# Altium PCB 0505_MEZ.PcbDoc
Units mil, origin at the board's own origin, x right, y up, seen from the top; angles counter-clockwise.
Board outline 2480.31 x 2519.68 mil, 2 copper layers (Top Layer, Bottom Layer); 5 components, 40 nets, 276 pads, 179 vias.
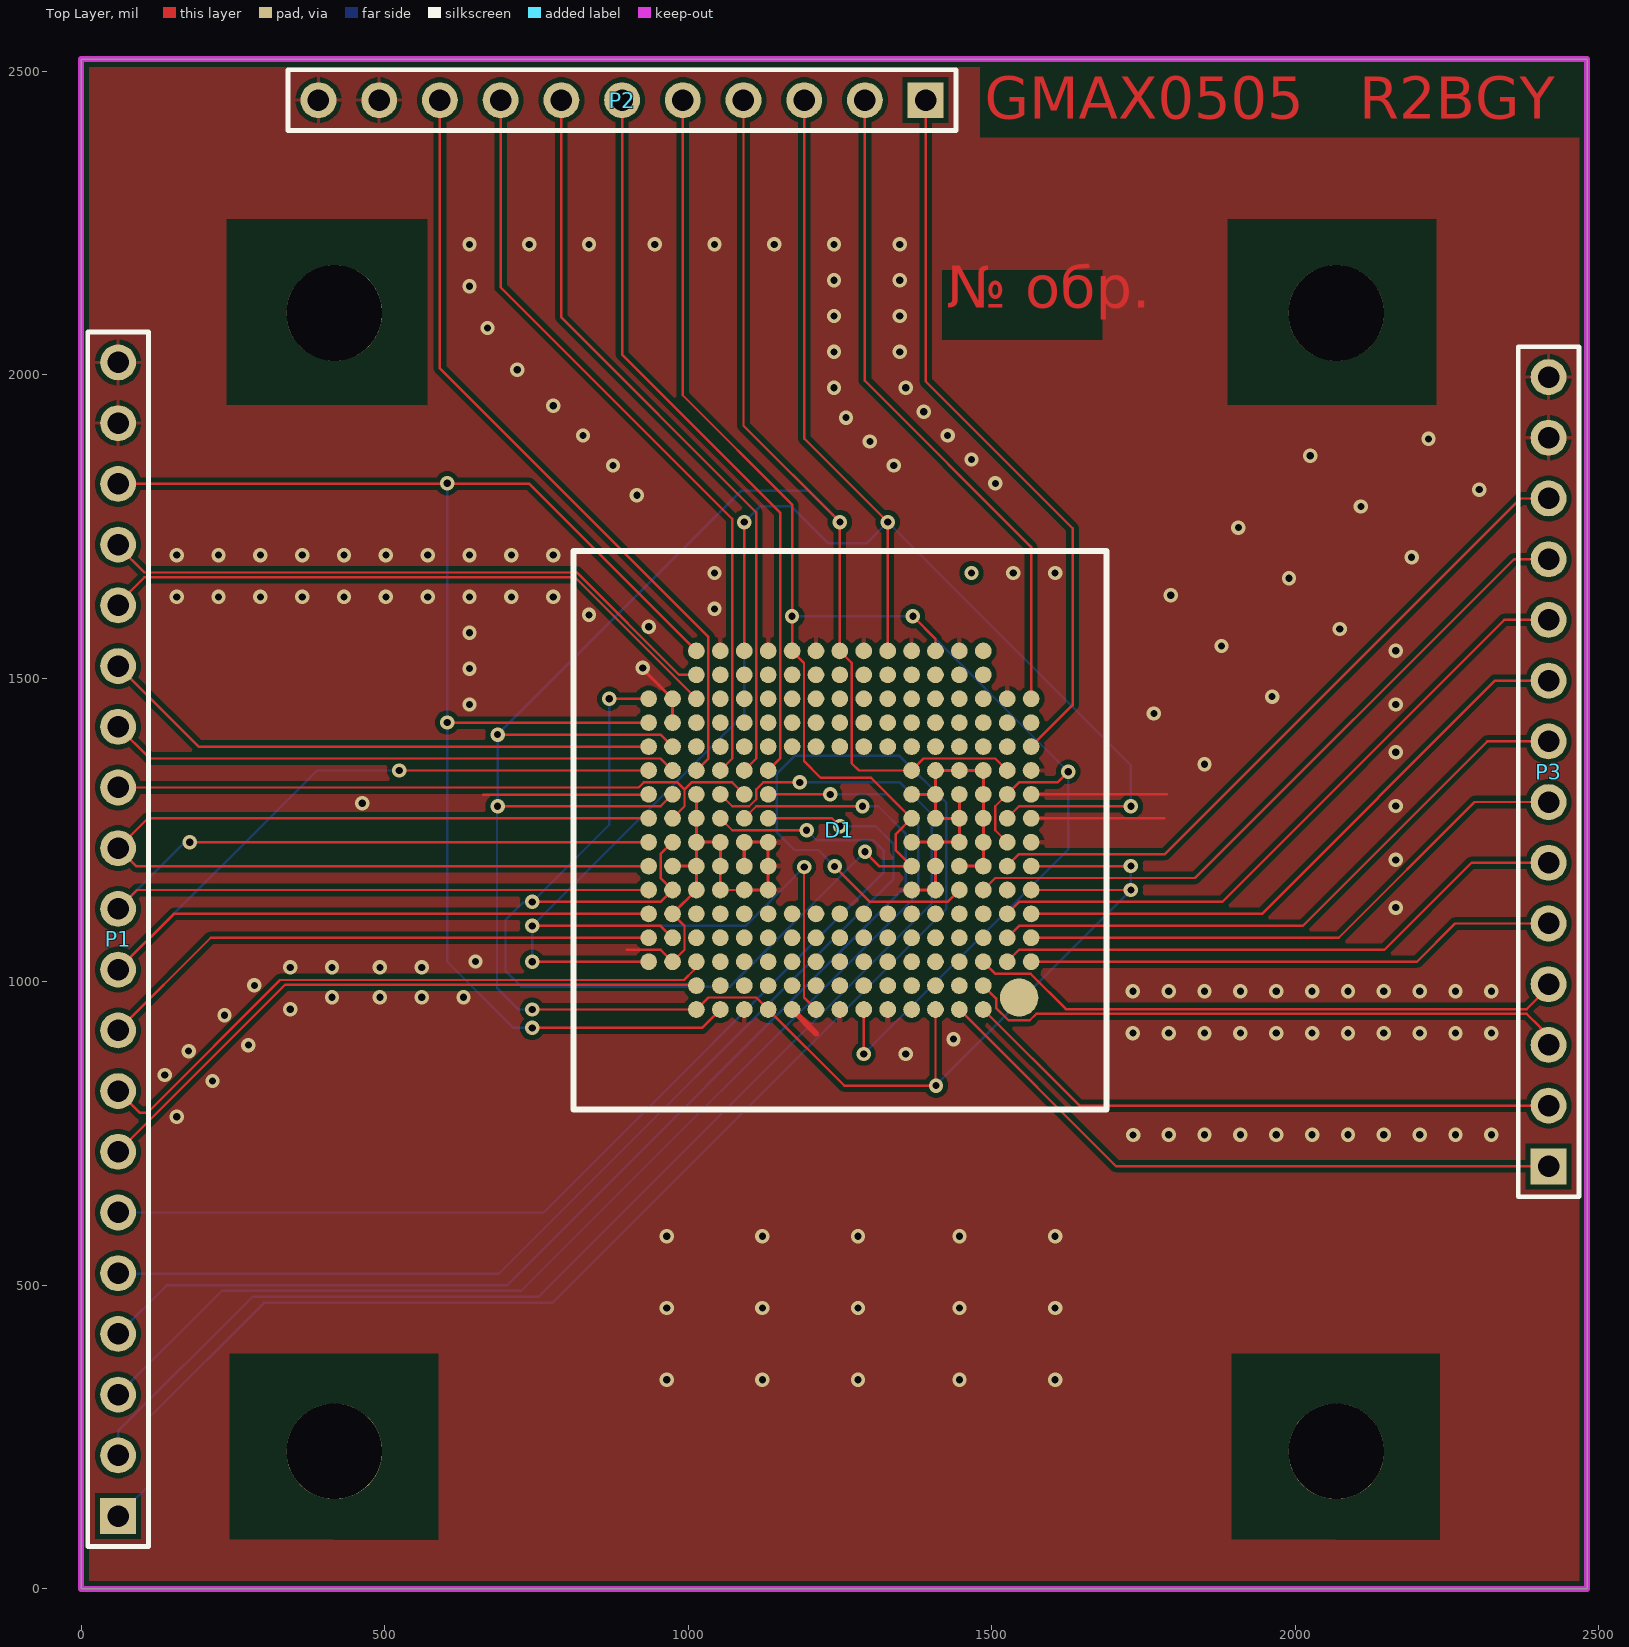
[diagram p0: Top Layer view]
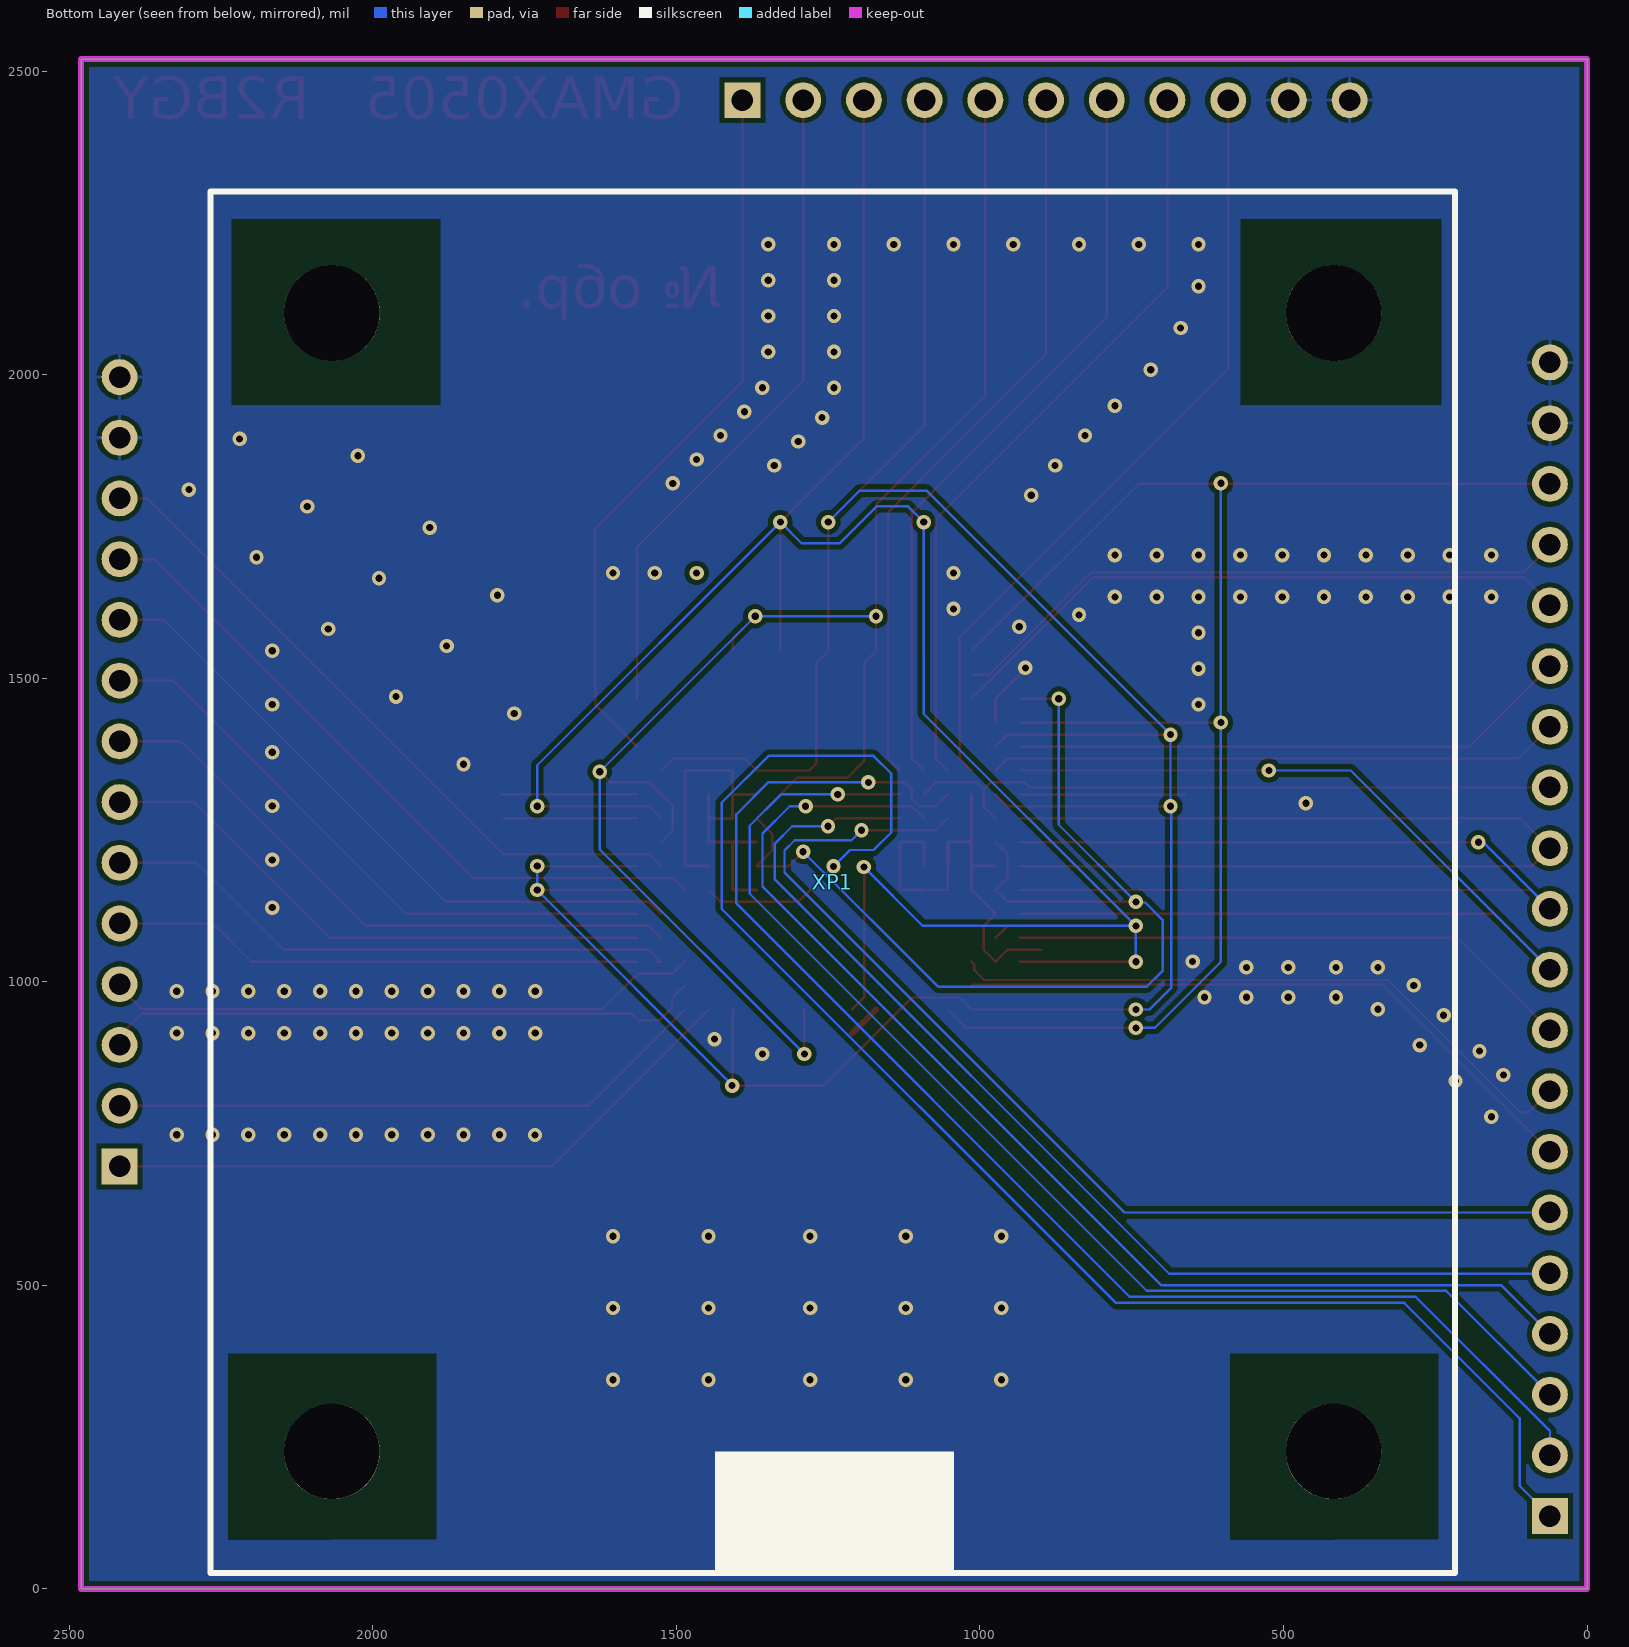
[diagram p1: Bottom Layer view, seen from below]

## Layer stack, top to bottom
Top Solder: solder mask 0.4, Solder Resist, Dk 3.5
Top Layer: signal copper 1.4
Dielectric 1: dielectric 12.6, FR-4, Dk 4.8
Bottom Layer: signal copper 1.4
Bottom Solder: solder mask 0.4, Solder Resist, Dk 3.5

## Board outline
0,0 0,2519.68 2480.31,2519.68 2480.31,0

## Design rules (kind name [scope] priority, off if disabled: settings)
BoardOutlineClearance [OnLayer('Multi-Layer')] p1: gap=10 ignorepadtopadclearanceinfootprint=FALSE except(0: Arc-SplitContinuation Track-SplitContinuation SMDPad-SplitContinuation THPad-SplitContinuation Via-SplitContinuation Fill-SplitContinuation Poly-SplitContinuation Region-SplitContinuation Text-SplitContinuation; 15.75: Arc-OutlineEdge Track-OutlineEdge SMDPad-OutlineEdge THPad-OutlineEdge Via-OutlineEdge Fill-OutlineEdge Poly-OutlineEdge Region-OutlineEdge Text-OutlineEdge)
Clearance [All] p1: gap=4.92 ignorepadtopadclearanceinfootprint=FALSE except(3.94: Track-Track Track-SMDPad Track-THPad Track-Via; 7.87: Arc-Fill Arc-Poly Track-Fill Track-Poly SMDPad-Fill SMDPad-Poly THPad-Fill THPad-Poly Via-Fill Via-Poly Fill-Fill Fill-Poly Poly-Poly Poly-Region Poly-Text; 9.84: Arc-Hole Track-Hole SMDPad-Hole THPad-Hole Via-Hole Fill-Hole Poly-Hole Region-Hole Text-Hole) // Standart
DiffPairsRouting [All] p1: maxlimit=10 minlimit=5 mostfreqgap=5.12 toplayer_minwidth=5 toplayer_maxwidth=15 toplayer_prefwidth=14.57 bottomlayer_minwidth=5 bottomlayer_maxwidth=15 bottomlayer_prefwidth=14.57 maxuncoupledlength=500
HoleSize [All] p1: absolutevalues=TRUE maxlimit=196.85 minlimit=11.81 maxpercent=80.000 minpercent=20.000
MinimumSolderMaskSliver [All] p1: minsoldermaskwidth=2.95
PlaneClearance "PlaneClearance-1 1/2 Oz" [All] p1: clearance=7.87 // Standart
PlaneConnect "TermalConnect-1 1/2 Oz" [All] p1: planeconnectstyle=Relief reliefexpansion=7.87 reliefentries=4 reliefconductorwidth=7.87 reliefairgap=7.87 // Standart
PolygonConnect "PolygonConnect-1 1/2 Oz" [All] p1: thpad.connectstyle=Relief thpad.reliefconductorwidth=5.91 thpad.reliefentries=4 thpad.polygonreliefangle="90 Angle" thpad.airgapwidth=7.87 smdpad.connectstyle=Relief smdpad.reliefconductorwidth=7.87 smdpad.reliefentries=4 smdpad.polygonreliefangle="90 Angle" smdpad.airgapwidth=7.87 via.connectstyle=Direct via.reliefconductorwidth=10 via.reliefentries=4 via.polygonreliefangle="90 Angle" via.airgapwidth=10 // Standart
RoutingVias [All] p1: holewidth=11.81 width=50 viastyle="Through Hole" minholewidth=11.81 minwidth=23.62 maxholewidth=28 maxwidth=50
SilkToSilkClearance [All] p1: silktosilkclearance=0
SilkToSolderMaskClearance [IsPad] p1: minsilkscreentomaskgap=0 clearancetoexposedcopper=TRUE
SolderMaskExpansion [All] p1: expansion=4 istentingtop=FALSE
UnRoutedNet [All] p1: checkbadconnections=TRUE
Width [All] p1: maxlimit=98.43 minlimit=3.94 preferedwidth=3.94
22 further rules are at their usual default settings.

## Classes and differential pairs
component class Sheet1_GMAX0505_MEZ: D1 P1 P2 P3
differential pair OUTT0: +OUTT0_P -OUTT0_N
differential pair OUTB0: +OUTB0_P -OUTB0_N
differential pair CLKOUT: +CLKOUT_P -CLKOUT_N

## Components (designator, comment, footprint, x,y, rotation, side; value= is the part's Value field where it differs from the comment)
D1 "GMAX0505" GMAX0505 1545,974 r0 top
P1 "Header 20" HDR1X20 61,120 r90 top
P2 "Header 11" HDR1X11 1391,2452 r180 top
P3 "Header 14" HDR1X14 2417,696 r90 top
XP1 "Грелка" Грелка 417.24,2101.46 r90 bottom

## Footprints (in the part's own frame and the unit in brackets; to place one, negate y for a bottom-side part, rotate by r counter-clockwise, add the part's x,y. Pads: shape width x height; smd on the part's side, far side on the other; paste and mask are expansions set on the pad)
GMAX0505 [mm] "GMAX0505"
  round 1.6 smd: 3(0,0)
  round 0.7 smd: A3(-1.5,-0.5) A4(-2.5,-0.5) A5(-3.5,-0.5) A6(-4.5,-0.5) A7(-5.5,-0.5) A8(-6.5,-0.5) A9(-7.5,-0.5) A10(-8.5,-0.5) A11(-9.5,-0.5) A12(-10.5,-0.5) A13(-11.5,-0.5) A14(-12.5,-0.5) A15(-13.5,-0.5) B3(-1.5,0.5) B4(-2.5,0.5) B5(-3.5,0.5) B6(-4.5,0.5) B7(-5.5,0.5) B8(-6.5,0.5) B9(-7.5,0.5) B10(-8.5,0.5) B11(-9.5,0.5) B12(-10.5,0.5) B13(-11.5,0.5) B14(-12.5,0.5) B15(-13.5,0.5) C1(0.5,1.5) C2(-0.5,1.5) C3(-1.5,1.5) C4(-2.5,1.5) C5(-3.5,1.5) C6(-4.5,1.5) C7(-5.5,1.5) C8(-6.5,1.5) C9(-7.5,1.5) C10(-8.5,1.5) C11(-9.5,1.5) C12(-10.5,1.5) C13(-11.5,1.5) C14(-12.5,1.5) C15(-13.5,1.5) C16(-14.5,1.5) C17(-15.5,1.5) D1(0.5,2.5) D2(-0.5,2.5) D3(-1.5,2.5) D4(-2.5,2.5) D5(-3.5,2.5) D6(-4.5,2.5) D7(-5.5,2.5) D8(-6.5,2.5) D9(-7.5,2.5) D10(-8.5,2.5) D11(-9.5,2.5) D12(-10.5,2.5) D13(-11.5,2.5) D14(-12.5,2.5) D15(-13.5,2.5) D16(-14.5,2.5) D17(-15.5,2.5) E1(0.5,3.5) E2(-0.5,3.5) E3(-1.5,3.5) E4(-2.5,3.5) E5(-3.5,3.5) E6(-4.5,3.5) E7(-5.5,3.5) E8(-6.5,3.5) E9(-7.5,3.5) E10(-8.5,3.5) E11(-9.5,3.5) E12(-10.5,3.5) E13(-11.5,3.5) E14(-12.5,3.5) E15(-13.5,3.5) E16(-14.5,3.5) E17(-15.5,3.5) F1(0.5,4.5) F2(-0.5,4.5) F3(-1.5,4.5) F4(-2.5,4.5) F5(-3.5,4.5) F6(-4.5,4.5) F12(-10.5,4.5) F13(-11.5,4.5) F14(-12.5,4.5) F15(-13.5,4.5) F16(-14.5,4.5) F17(-15.5,4.5) G1(0.5,5.5) G2(-0.5,5.5) G3(-1.5,5.5) G4(-2.5,5.5) G5(-3.5,5.5) G6(-4.5,5.5) G12(-10.5,5.5) G13(-11.5,5.5) G14(-12.5,5.5) G15(-13.5,5.5) G16(-14.5,5.5) G17(-15.5,5.5) H1(0.5,6.5) H2(-0.5,6.5) H3(-1.5,6.5) H4(-2.5,6.5) H5(-3.5,6.5) H6(-4.5,6.5) H12(-10.5,6.5) H13(-11.5,6.5) H14(-12.5,6.5) H15(-13.5,6.5) H16(-14.5,6.5) H17(-15.5,6.5) J1(0.5,7.5) J2(-0.5,7.5) J3(-1.5,7.5) J4(-2.5,7.5) J5(-3.5,7.5) J6(-4.5,7.5) J12(-10.5,7.5) J13(-11.5,7.5) J14(-12.5,7.5) J15(-13.5,7.5) J16(-14.5,7.5) J17(-15.5,7.5) K1(0.5,8.5) K2(-0.5,8.5) K3(-1.5,8.5) K4(-2.5,8.5) K5(-3.5,8.5) K6(-4.5,8.5) K12(-10.5,8.5) K13(-11.5,8.5) K14(-12.5,8.5) K15(-13.5,8.5) K16(-14.5,8.5) K17(-15.5,8.5) L1(0.5,9.5) L2(-0.5,9.5) L3(-1.5,9.5) L4(-2.5,9.5) L5(-3.5,9.5) L6(-4.5,9.5) L12(-10.5,9.5) L13(-11.5,9.5) L14(-12.5,9.5) L15(-13.5,9.5) L16(-14.5,9.5) L17(-15.5,9.5) M1(0.5,10.5) M2(-0.5,10.5) M3(-1.5,10.5) M4(-2.5,10.5) M5(-3.5,10.5) M6(-4.5,10.5) M7(-5.5,10.5) M8(-6.5,10.5) M9(-7.5,10.5) M10(-8.5,10.5) M11(-9.5,10.5) M12(-10.5,10.5) M13(-11.5,10.5) M14(-12.5,10.5) M15(-13.5,10.5) M16(-14.5,10.5) M17(-15.5,10.5) N1(0.5,11.5) N2(-0.5,11.5) N3(-1.5,11.5) N4(-2.5,11.5) N5(-3.5,11.5) N6(-4.5,11.5) N7(-5.5,11.5) N8(-6.5,11.5) N9(-7.5,11.5) N10(-8.5,11.5) N11(-9.5,11.5) N12(-10.5,11.5) N13(-11.5,11.5) N14(-12.5,11.5) N15(-13.5,11.5) N16(-14.5,11.5) N17(-15.5,11.5) P1(0.5,12.5) P2(-0.5,12.5) P3(-1.5,12.5) P4(-2.5,12.5) P5(-3.5,12.5) P6(-4.5,12.5) P7(-5.5,12.5) P8(-6.5,12.5) P9(-7.5,12.5) P10(-8.5,12.5) P11(-9.5,12.5) P12(-10.5,12.5) P13(-11.5,12.5) P14(-12.5,12.5) P15(-13.5,12.5) P16(-14.5,12.5) P17(-15.5,12.5) R3(-1.5,13.5) R4(-2.5,13.5) R5(-3.5,13.5) R6(-4.5,13.5) R7(-5.5,13.5) R8(-6.5,13.5) R9(-7.5,13.5) R10(-8.5,13.5) R11(-9.5,13.5) R12(-10.5,13.5) R13(-11.5,13.5) R14(-12.5,13.5) R15(-13.5,13.5) T3(-1.5,14.5) T4(-2.5,14.5) T5(-3.5,14.5) T6(-4.5,14.5) T7(-5.5,14.5) T8(-6.5,14.5) T9(-7.5,14.5) T10(-8.5,14.5) T11(-9.5,14.5) T12(-10.5,14.5) T13(-11.5,14.5) T14(-12.5,14.5) T15(-13.5,14.5)
  silkscreen extent -18.65,-4.67 3.65,18.68
HDR1X11 [mm] "Connector; Header; 11 Position"
  rect 1.5x1.5 hole 0.9: 1(0,0)
  round 1.5 hole 0.9: 2(2.54,0) 3(5.08,0) 4(7.62,0) 5(10.16,0) 6(12.7,0) 7(15.24,0) 8(17.78,0) 9(20.32,0) 10(22.86,0) 11(25.4,0)
  silkscreen extent -1.27,-1.27 26.67,1.27
HDR1X14 [mm] "Connector; Header; 14 Position"
  rect 1.5x1.5 hole 0.9: 1(0,0)
  round 1.5 hole 0.9: 2(2.54,0) 3(5.08,0) 4(7.62,0) 5(10.16,0) 6(12.7,0) 7(15.24,0) 8(17.78,0) 9(20.32,0) 10(22.86,0) 11(25.4,0) 12(27.94,0) 13(30.48,0) 14(33.02,0)
  silkscreen extent -1.27,-1.27 34.29,1.27
HDR1X20 [mm] "Connector; Header; 20 Position"
  rect 1.5x1.5 hole 0.9: 1(0,0)
  round 1.5 hole 0.9: 2(2.54,0) 3(5.08,0) 4(7.62,0) 5(10.16,0) 6(12.7,0) 7(15.24,0) 8(17.78,0) 9(20.32,0) 10(22.86,0) 11(25.4,0) 12(27.94,0) 13(30.48,0) 14(33.02,0) 15(35.56,0) 16(38.1,0) 17(40.64,0) 18(43.18,0) 19(45.72,0) 20(48.26,0)
  silkscreen extent -1.27,-1.27 49.53,1.27
Грелка [mm]
  round 4 hole 4 unplated: 0(-47.625,0) 0(-47.625,41.91) 0(0,0) 0(0,41.91)
  silkscreen extent -52.7,-5.08 5.08,46.99

## Part data
P1: "Header, 20-Pin", LatestRevisionDate=17-Jul-2002, LatestRevisionNote="Re-released for DXP Platform.", Publisher="Altium Limited"
P2: "Header, 11-Pin", LatestRevisionDate=17-Jul-2002, LatestRevisionNote="Re-released for DXP Platform.", Publisher="Altium Limited"
P3: "Header, 14-Pin", LatestRevisionDate=17-Jul-2002, LatestRevisionNote="Re-released for DXP Platform.", Publisher="Altium Limited"

## Via types
v1: diameter 23.62, hole 11.81, Top Layer to Bottom Layer, 179 vias

## Nets (pads, with @x,y where several pads share a name; then routed paths per layer and width w, separated by ;. In a path a pad name is that pad's centre, name@x,y a point inside that pad or via, vN(x,y) a via of type N, cw(c..) or ccw(c..) an arc to the next point about the centre after c; other vN are vias at no path point)
CLK_REF: D1.L14 P2.8 | length 1270.2
  Top Layer w3.94: P2.8 691,2144 1072.56,1762.44 1072.56,1497.34 1072.56,1367.7 D1.L14
CLKOUT_N: D1.C3 P3.4 | length 983.3
  Top Layer w3.94: D1.C3 1506,1013 1564,1013 1622,955 2381,955 2417,991 P3.4
CLKOUT_P: D1.B3 P3.3 | length 998.6
  Top Layer w3.94: D1.B3@1486.31,993.69 D1.B3 1507,972.63 1507,957 1527.4,936.6 1562.6,936.6 1573.13,947.13 2381,947.13 2403.45,924.68 2403.45,924.47 2417,910.91 P3.3
GND: D1.A7 D1.A9 D1.A11 D1.A13 D1.C16 D1.E16 D1.F5 D1.F6 D1.F12 D1.F13 D1.F14 D1.F15 D1.G3 D1.G4 D1.G5 D1.G12 D1.G13 D1.G14 D1.G15 D1.G16 D1.H1 D1.H3 D1.H4 D1.H5 D1.H6 D1.H12 D1.H13 D1.H14 D1.H15 D1.J1 D1.J3 D1.J4 D1.J5 D1.J15 D1.K1 D1.K3 D1.K4 D1.K5 D1.K6 D1.K15 D1.K17 D1.L1 D1.L3 D1.L4 D1.L5 D1.N16 D1.P2 D1.P16 D1.T4 D1.T6 D1.T8 D1.T10 D1.T12 D1.T14 P1.19 P1.20 P2.10 P2.11 P3.13 P3.14 | length 2376.7
  Top Layer w3.94: 662,1308 934.12,1308 D1.K17 ; 899,1053 899.26,1052.74 954.45,1052.74 D1.C16 993.82,1052.74 993.82,1092.11 D1.E16 ; D1.G14 D1.F14 D1.F13 ; D1.J1 1784.28,1269.28 ; D1.K1 1788.35,1308.65
  Top Layer w5: v1(925,1517) 925,1515.26 D1.P16 D1.N16 ; D1.E16 D1.F15 D1.G15 ; D1.G16 D1.G15 ; D1.K15 D1.J15 D1.H15 ; D1.G14 D1.H14 D1.H15 ; D1.F13 D1.F12 D1.G12 D1.H12 D1.H13 D1.G13 ; D1.F6 D1.F5 D1.G5 D1.H5 ; D1.H6 D1.H5 ; D1.K6 D1.K5 ; D1.G4 D1.G3 D1.H3 D1.J3 D1.K3 D1.L3 D1.L4 D1.L5 D1.K5 ; D1.K4 D1.J4 ; D1.G15 D1.H15 ; D1.H5 D1.H4 D1.J4 ; D1.K5 D1.J5 1407.48,1269 1446.3,1269 D1.J4
  Top Layer w10: D1.A11 1210.29,915.01
  other v1: 964.57,344.49 1122.05,344.49 1279.53,344.49 1446.85,344.49 1604.33,344.49 964.57,462.6 1122.05,462.6 1279.53,462.6 1446.85,462.6 1604.33,462.6 964.57,580.71 1122.05,580.71 1279.53,580.71 1446.85,580.71 1604.33,580.71 1732.68,747.63 1791.34,748.03 1850.39,748.03 1909.45,748.03 1968.5,748.03 2027.56,748.03 2086.61,748.03 2145.67,748.03 2204.72,748.03 2263.78,748.03 2322.83,748.03 157.48,777.56 216.54,836.61 137.8,846.46 1358.27,881 177.17,885.83 275.59,895.67 1437.01,905.51 1732.28,915.35 1791.34,915.35 1850.39,915.35 1909.45,915.35 1968.5,915.35 2027.56,915.35 2086.61,915.35 2145.67,915.35 2204.72,915.35 2263.78,915.35 2322.83,915.35 236.22,944.88 344.49,954.72 413.39,974.41 492.13,974.41 561.02,974.41 629.92,974.41 1732.28,984.25 1791.34,984.25 1850.39,984.25 1909.45,984.25 1968.5,984.25 2027.56,984.25 2086.61,984.25 2145.67,984.25 2204.72,984.25 2263.78,984.25 2322.83,984.25 285.43,994.09 344.49,1023.62 413.39,1023.62 492.13,1023.62 561.02,1023.62 649.61,1033.46 2165.35,1122.05 2165.35,1200.79 2165.35,1289.37 463.04,1294.04 1850.39,1358.27 2165.35,1377.95 1766.88,1441.78 639.76,1456.69 2165.35,1456.69 1961.75,1469.62 639.76,1515.75 2165.35,1545.28 1878.23,1553.14 639.76,1574.8 2073.1,1580.98 935.04,1584.65 836.61,1604.33 1043.31,1614.17 157.48,1633.86 226.38,1633.86 295.28,1633.86 364.17,1633.86 433.07,1633.86 501.97,1633.86 570.87,1633.86 639.76,1633.86 708.66,1633.86 777.56,1633.86 1794.72,1636.66 1989.59,1664.5 1043.31,1673.23 1535.43,1673.23 1604.33,1673.23 2191.42,1699.29 157.48,1702.76 226.38,1702.76 295.28,1702.76 364.17,1702.76 433.07,1702.76 501.97,1702.76 570.87,1702.76 639.76,1702.76 708.66,1702.76 777.56,1702.76 1906.07,1748.01 2107.9,1782.81 915.35,1801.18 2302.77,1810.65 1505.91,1820.87 875.98,1850.39 1338.58,1850.39 1466.54,1860.24 2024.39,1866.33 1299.21,1889.76 2219.26,1894.17 826.77,1899.61 1427.17,1899.61 1259.84,1929.13 1387.8,1938.98 777.56,1948.82 1240.16,1978.35 1358.27,1978.35 718.5,2007.87 1240.16,2037.4 1348.43,2037.4 669.29,2076.77 1240.16,2096.46 1348.43,2096.46 639.76,2145.67 1240.16,2155.51 1348.43,2155.51 639.76,2214.57 738.19,2214.57 836.61,2214.57 944.88,2214.57 1043.31,2214.57 1141.73,2214.57 1240.16,2214.57 1348.43,2214.57
OUTB0_N: D1.C15 P1.8 | length 1076.2
  Top Layer w3.94: P1.8 97,784 108.86,784 327.73,1002.86 992.86,1002.86 1008.98,1018.98 1008.98,1028.54 D1.C15
OUTB0_P: D1.B15 P1.7 | length 1066.9
  Top Layer w3.94: P1.7 335.99,994.99 1012.2,994.99 D1.B15
OUTT0_N: D1.R15 P1.17 | length 1042.9
  Top Layer w3.94: P1.17 61,1717.28 104.28,1674 816.77,1674 985.27,1505.5 D1.R15
OUTT0_P: D1.P15 P1.16 | length 1056.1
  Top Layer w3.94: P1.16 61,1622.84 104.28,1666.13 813.5,1666.13 D1.P15
SPI_CLK: D1.J14 P1.6 | length 1819.9
  Top Layer w3.94: D1.J14 1072.56,1249.59 v1@1195,1249.59
  Bottom Layer w3.94: P1.6 762,620 1321.77,1179.77 1321.77,1216.23 1305,1233 1211.67,1233 v1(1195.04,1249.63)
SPI_EN: D1.L13 P2.7 | length 1245.1
  Top Layer w3.94: P2.7 791,2094 1111.93,1773.07 1111.93,1497.34 1111.93,1367.7 D1.L13
SPI_IN: D1.K12 P1.3 | length 2040.5
  Top Layer w3.94: D1.K12 v1(1234.04,1308.69)
  Bottom Layer w3.94: P1.3 232,491 725,491 1379,1145 1379,1257 1327.31,1308.69 v1(1234.04,1308.69)
SPI_OUT: D1.L12 P2.6 | length 1220
  Top Layer w3.94: P2.6 891,2033 1151.3,1772.7 1151.3,1536.71 1151.3,1367.7 D1.L12
SYS_RST_N: D1.K14 P1.2 | length 2290.8
  Top Layer w3.94: D1.K14 1072.56,1288.96 1100.4,1288.96 1111.93,1300.49 1111.93,1316.8 1123.46,1328.33 v1(1183.67,1328.33)
  Bottom Layer w3.94: P1.2 61,260 282,481 753,481 1401,1129 1401,1276 1348.67,1328.33 v1(1183.67,1328.33)
TDIG0: D1.J12 P1.5 | length 1828.1
  Top Layer w3.94: D1.J12 1236.72,1269.28 v1@1250,1256
  Bottom Layer w3.94: P1.5@61,519 688,519 1338,1169 1338,1227 1308.96,1256.04 v1(1250.04,1256.04)
TDIG1: D1.J13 P1.4 | length 1981.8
  Top Layer w3.94: D1.J13 1111.93,1288.96 1123.46,1288.96 1286.96,1288.96 v1(1287,1289)
  Bottom Layer w3.94: P1.4 141,500 701,500 1358,1157 1358,1244 1313,1289 v1(1287,1289)
TEXP0: D1.L16 P1.14 | length 943
  Top Layer w3.94: P1.14 113.3,1367.7 942.92,1367.7 954.45,1367.7 D1.L16
TEXP1: D1.L15 P2.9 | length 1295.3
  Top Layer w3.94: P2.9 591,2010 1033.19,1567.81 1033.19,1418.6 1033.19,1395.54 1033.19,1367.7 D1.L15
VCBN: D1.A3 P3.2 | length 996.6
  Top Layer w3.94: D1.A3 1644.26,796 P3.2
VCIBP: D1.D2 P3.8 | length 1025.7
  Top Layer w3.94: D1.D2 1545,1092.11 2012.11,1092.11 2316,1396 P3.8
VCLBN: D1.P1 P2.2 | length 1099.2
  Top Layer w3.94: P2.2 1291,1990 1564.69,1716.31 D1.P1
VCLPCN: D1.G2 P3.12 | length 1146.7
  Top Layer w3.94: D1.G2 1545,1210.22 1785,1210.22 2370.78,1796 P3.12@2421.19,1796
VDD13AD: D1.A10 D1.C17 D1.D16 D1.J2 D1.T7 D1.T13 P2.3 | length 4339.5
  Top Layer w3.94: v1(743.04,1033.09) D1.C17 ; v1@743,1092 918,1092 918.11,1092.11 954.45,1092.11 D1.D16 ; D1.T13 v1@1092.24,1757 ; v1(1191,1189) 1190.67,1188.67 1190.67,1041.21 1190.67,974 D1.A10 ; P2.3 1191,1894.54 v1(1328.5,1757.04) ; D1.T7 v1@1328.46,1757 ; D1.J2 1545,1288.96 v1(1729.04,1289)
  Bottom Layer w3.94: v1(743.04,1033.09) v1(743.04,1092.04) ; v1(1191,1189) 1094.04,1092.04 v1(743.04,1092.04) ; v1(1729.04,1289) 1729.04,1356.5 v1(1328.5,1757.04) 1293.46,1722 1231,1722 1170,1783 1118.24,1783 v1(1092.28,1757.04) 1092.28,1441.28 v1(743.04,1092.04)
VDD13D: D1.A8 D1.F16 D1.G6 D1.H2 D1.H16 D1.J6 D1.K2 D1.P17 D1.T5 D1.T11 P2.5 | length 4718.2
  Top Layer w3.94: v1@743,1131.48 954.45,1131.48 D1.F16 954.45,1170.85 954.45,1210.22 D1.H16 ; v1(870,1466) 870.13,1466.13 D1.P17 ; P2.5 991,1966 1171.02,1785.98 v1@1171.02,1602.02 ; D1.T11 1190.67,1525.18 1190.67,1497.34 1190.67,1363.33 1218,1336 1301.11,1336 D1.J6 1342,1243.44 1342,1216.37 D1.G6 1314.46,1190.54 v1@1291,1214 ; D1.T11@1171,1544.88 v1(1171,1602) ; v1(1289,881) 1289.09,881.09 D1.A8 ; v1(1370,1602) 1407.2,1564.8 D1.T5 ; D1.H2 1505.63,1249.59 1505.63,1288.96 D1.K2 1545,1328.33 1608.33,1328.33 v1(1626,1346)
  Bottom Layer w3.94: v1(870,1466) 870,1258.48 v1(743.04,1131.52) 742.15,1130.63 727.63,1130.63 699,1102 699,1018 725,992 1069,992 v1(1291.04,1214.04) ; v1(1171,1602) v1(1370,1602) v1(1626,1346) 1626,1218 v1(1289,881)
VDD33A: D1.A5 D1.A12 D1.A15 D1.F1 D1.G1 D1.K16 D1.L2 D1.L6 D1.M16 D1.T9 P2.4 | length 4960
  Top Layer w3.94: v1(686,1289) v1(686,1289) 954.45,1288.96 D1.K16 ; v1(686,1407) 686.07,1407.07 942.92,1407.07 954.45,1407.07 D1.M16 ; v1(743.04,954.35) D1.A15 1033.19,974 1100.4,974 1111.93,974 D1.A12 1256.93,829 v1(1408,829) 1407.2,829.8 D1.A5 ; P2.4 1091,1915.8 v1(1249.76,1757.04) ; v1@1249.72,1757 D1.T9 1269.41,1525.18 1269.41,1497.34 1269.41,1457.97 1269.41,1418.6 1269.41,1359.59 1280.98,1348.02 D1.L6 1387.52,1367.7 1505.63,1367.7 D1.L2 ; D1.F1 v1(1729.04,1151.2) ; D1.G1 v1(1729.04,1190.57)
  Bottom Layer w3.94: v1(743.04,954.35) 720.65,954.35 685,990 685,1288 v1(686,1289) 686,1401 v1(686,1407) 1088,1809 1197.8,1809 v1(1249.76,1757.04) ; v1(1408,829) 1408,830.17 v1(1729.04,1151.2) v1(1729.04,1190.57)
VDDCL: D1.M17 P1.15 | length 928.7
  Top Layer w3.94: P1.15 193.61,1387.39 D1.M17
VDDIO: D1.J16 D1.K13 P1.13 | length 1127.7
  Top Layer w3.94: P1.13@41.25,1316.8 57.06,1319.36 57.06,1319.11 P1.13@59.36,1316.8 ; P1.13 918.39,1320 918.39,1320.11 926.61,1328.33 982.29,1328.33 993.82,1316.8 ; D1.J16 993.82,1288.96 993.82,1316.8 ; D1.K13 1072.56,1328.33 1005.35,1328.33 993.82,1316.8
VDDPIX: D1.A14 D1.N17 D1.T15 P1.18 | length 2696.2
  Top Layer w3.94: P1.18 602,1820 v1(603,1821) 604,1820 738.37,1820 D1.T15 ; v1(603,1427) 603.24,1426.76 D1.N17 ; v1@743,924 1022.56,924 D1.A14
  Bottom Layer w3.94: P1.18 P1.18@62,1821 ; v1(603,1821) v1(603,1427) 603,1033 711.96,924.04 v1(743.04,924.04)
VDN: D1.F4 P1.1 | length 2794.3
  Top Layer w3.94: v1@1241,1190 1299.52,1131.48 1426.89,1131.48 D1.F4
  Bottom Layer w3.94: P1.1 111,170 111,281 301,471 776,471 1425,1120 1425,1295 1348,1372 1175,1372 1146,1343 1146,1246 1175,1217 1214.08,1217 v1(1241.04,1190.04)
VDP: D1.F3 P3.11 | length 1156.7
  Top Layer w3.94: D1.F3 1505.63,1170.85 1834.85,1170.85 2360,1696 P3.11
VG_RSTH: D1.E17 D1.L17 P1.10 | length 1940
  Top Layer w3.94: P1.10 152.8,1111.8 D1.E17 ; v1(524.02,1348.02) D1.L17
  Bottom Layer w3.94: P1.10@47.9,1006.9 P1.10 389.02,1348.02 v1(524.02,1348.02)
VGRSTL: D1.D17 P1.9 | length 936.9
  Top Layer w3.94: P1.9 213.43,1072.43 D1.D17
VPBN: D1.M1 P2.1 | length 1193.2
  Top Layer w3.94: P2.1 1391,1989 1633,1747 1633,1455.7 D1.M1
VPBP: D1.A4 P3.1 | length 1077.4
  Top Layer w3.94: D1.A4 1704.89,696 P3.1
VRBP: D1.E2 P3.10 | length 1092.2
  Top Layer w3.94: D1.E2 1545,1131.48 1879.48,1131.48 2344,1596 P3.10
VRCP: D1.E1 P3.9 | length 1011.5
  Top Layer w3.94: D1.E1 1944.8,1111.8 2329,1496 P3.9
VREF: D1.D1 P3.7 | length 944.9
  Top Layer w3.94: D1.D1 2071.43,1072.43 2295,1296 P3.7
VRF: D1.C1 P3.5 | length 878.4
  Top Layer w3.94: D1.C1 2200.06,1033.06 2263,1096 P3.5
VRS: D1.C2 P3.6 | length 965.6
  Top Layer w3.94: D1.C2@1531.71,1033.06 D1.C2 1545,1052.74 2146.74,1052.74 2290,1196 P3.6
VTXH: D1.G17 D1.J17 P1.12 | length 1780.1
  Top Layer w3.94: D1.G17 90.46,1190.54 P1.12 110.28,1269.28 D1.J17
VTXL: D1.F17 D1.H17 P1.11 | length 1806
  Top Layer w3.94: P1.11 92.17,1151.17 D1.F17 ; v1@178.92,1229.91 D1.H17
  Bottom Layer w3.94: P1.11 167.15,1226.15 175.15,1226.15 v1(178.92,1229.92)
pads on no net: D1.3 D1.A6 D1.B4 D1.B5 D1.B6 D1.B7 D1.B8 D1.B9 D1.B10 D1.B11 D1.B12 D1.B13 D1.B14 D1.C4 D1.C5 D1.C6 D1.C7 D1.C8 D1.C9 D1.C10 D1.C11 D1.C12 D1.C13 D1.C14 D1.D3 D1.D4 D1.D5 D1.D6 D1.D7 D1.D8 D1.D9 D1.D10 D1.D11 D1.D12 D1.D13 D1.D14 D1.D15 D1.E3 D1.E4 D1.E5 D1.E6 D1.E7 D1.E8 D1.E9 D1.E10 D1.E11 D1.E12 D1.E13 D1.E14 D1.E15 D1.F2 D1.M2 D1.M3 D1.M4 D1.M5 D1.M6 D1.M7 D1.M8 D1.M9 D1.M10 D1.M11 D1.M12 D1.M13 D1.M14 D1.M15 D1.N1 D1.N2 D1.N3 D1.N4 D1.N5 D1.N6 D1.N7 D1.N8 D1.N9 D1.N10 D1.N11 D1.N12 D1.N13 D1.N14 D1.N15 D1.P3 D1.P4 D1.P5 D1.P6 D1.P7 D1.P8 D1.P9 D1.P10 D1.P11 D1.P12 D1.P13 D1.P14 D1.R3 D1.R4 D1.R5 D1.R6 D1.R7 D1.R8 D1.R9 D1.R10 D1.R11 D1.R12 D1.R13 D1.R14 D1.T3 XP1.0
copper on no net:
  other v1: 1466.54,1673.23

## Polygon pours and split planes (outlines as drawn)
GND on Top Layer "Top Overlay-No Net" (solid, remove dead copper, pour order 0): 0,2519.68 0,0 2480.31,0 2480.31,2519.68
GND on Bottom Layer "Top Overlay-No Net" (solid, remove dead copper, pour order 1): 0,2519.68 0,0 2480.31,0 2480.31,2519.68

## Keep-outs
Keep-Out Layer:
  the board outline again, w10

## Other copper
Top Layer:
  text "GMAX0505   R2BGY" at 1488,2398 h118.11
  text "№ обр." at 1425.62,2087.46 h118.11
Multi-Layer:
  pour cut-out: 570,1949.48 570,2256 240,2256 240,1950.45
  pour cut-out: 2232,1949.44 2232,2256 1889,2256 1889,1950.45
  pour cut-out: 2238,80.44 2238,387 1895,387 1895,81.45
  pour cut-out: 588,80.44 588,387 245,387 245,81.45

## Silkscreen, mask and mechanical layers (free items; w line width, h text height)
Top Solder:
  rectangle: 1481,2390 2468,2507
  rectangle: 1419,2058 1681,2172